# EAGLE board lcmeter (EAGLE 4.16)
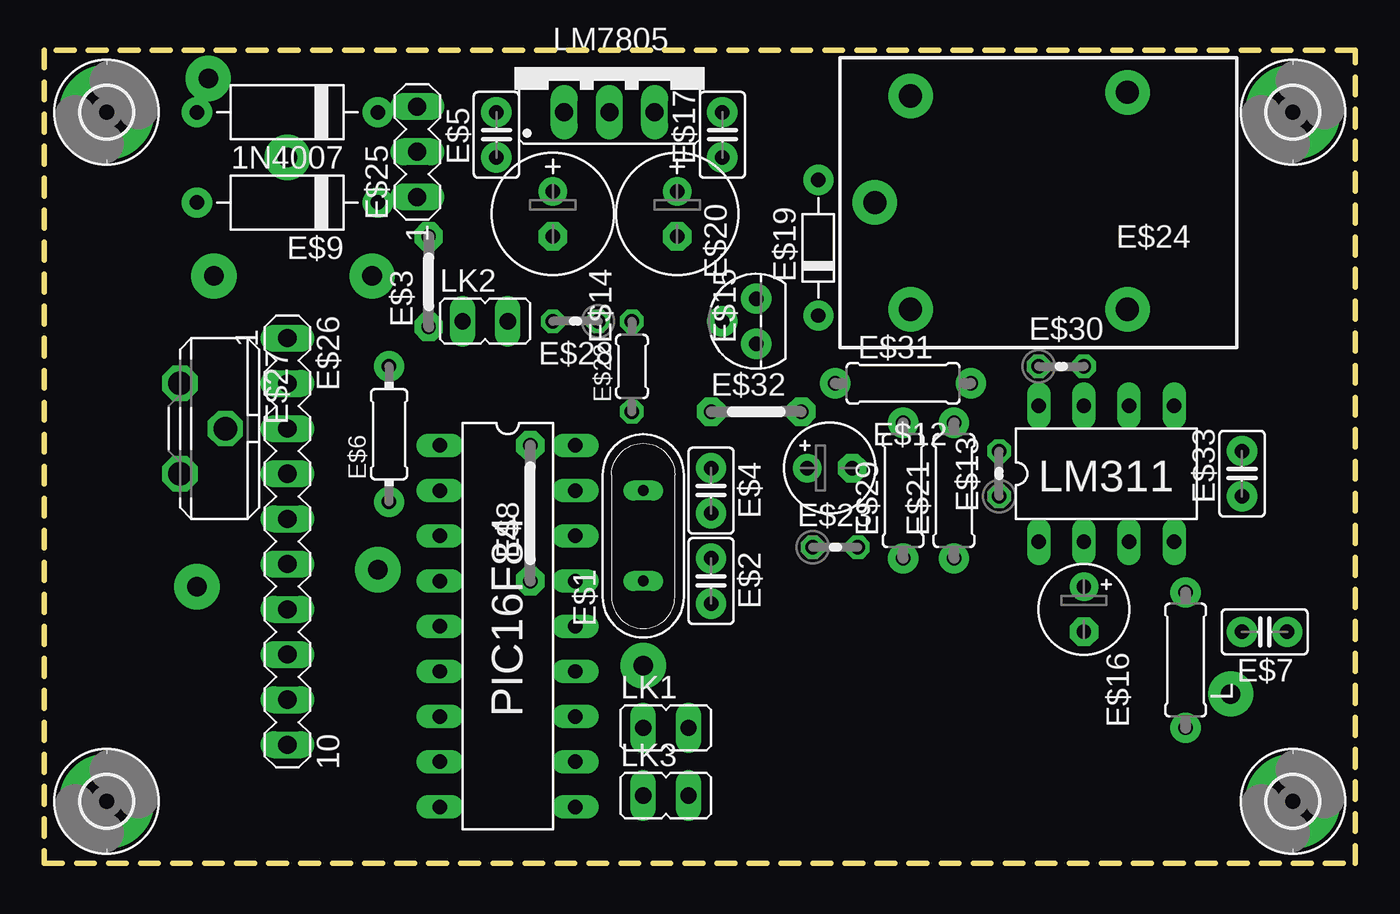
[diagram p0: board, top side]
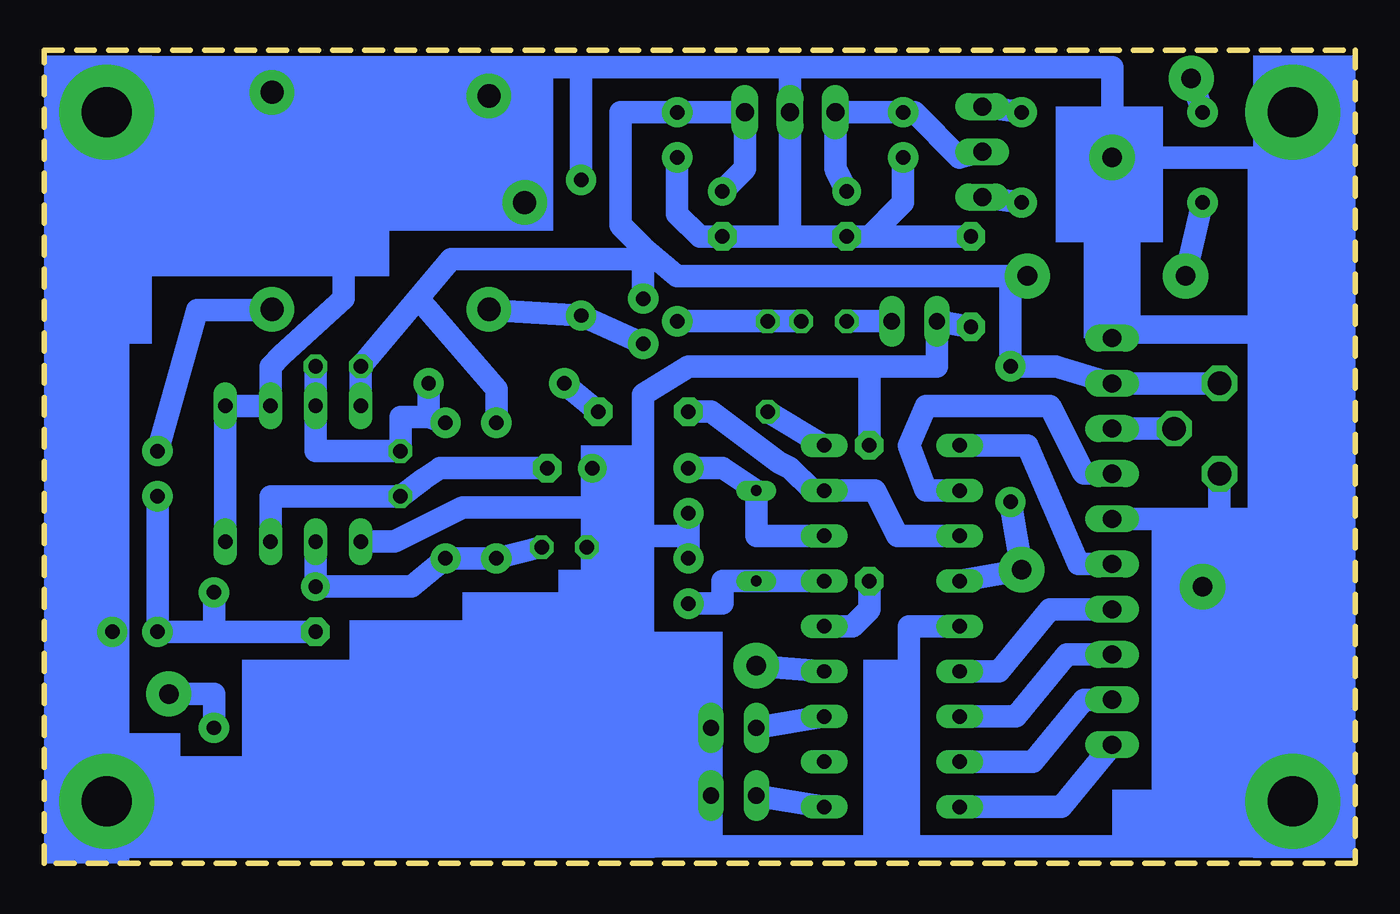
[diagram p1: board, bottom side, seen from below]

Size 73.66 x 45.72 mm. Coordinates in mm from the lower left corner, seen from the top.
Outline: 73.66,45.72 0,45.72 0,0 73.66,0 73.66,45.72
Copper layers (1*16): Top 0.035mm / dielectric 1.5mm / Bottom 0.035mm
Design rules "default": minimum track width 10mil, minimum drill 24mil, track to track 8mil, track to pad 8mil, pad to pad 8mil, via to via 8mil, smd to smd 8mil, copper to edge 40mil, drill to drill 8mil, minimum pad ring 10mil, minimum via ring 8mil, stop-mask expansion 4mil, vias tented up to drill 0mil, thermal gap 10mil

## Footprints (pad centres in the part's own frame; a part is rotated, then mirrored left to right if it is on the bottom)
D-10 = drill 0.813 pad 1.7 round: A 5.08,0; C -5.08,0
QS = drill 0.61 long: 1 -2.54,0; 2 2.54,0
C2.5-2 = drill 0.813 pad 1.7 round: 1 -1.27,0; 2 1.27,0
05 = drill 0.813 pad 1.6 octagon: 1 -2.54,0; 2 2.54,0
0204/7 = drill 0.813 pad 1.7 round: 1 -3.81,0; 2 3.81,0
07 = drill 0.813 pad 1.6 octagon: 1 -3.81,0; 2 3.81,0
E2,5-5 = drill 0.813 pad 1.6 round: + -1.27,0 | drill 0.813 pad 1.6 octagon: - 1.27,0
0204V = drill 0.813 octagon: 1 -1.27,0; 2 1.27,0
E2,5-7 = drill 0.813 pad 1.6 round: + -1.27,0 | drill 0.813 pad 1.6 octagon: - 1.27,0
D-7.5 = drill 0.813 pad 1.7 round: A 3.81,0; C -3.81,0
TO92 = drill 0.813 pad 1.7 round: 1 -1.27,0; 2 0,1.905; 3 1.27,0
0207/7 = drill 0.813 pad 1.7 round: 1 -3.81,0; 2 3.81,0
0204/5 = drill 0.813 octagon: 1 -2.54,0; 2 2.54,0
ZN5 = drill 1.3 pad 2.5 round: 11 8.89,0; 12 -5.31,-6.2; 14 -5.31,6; A1 6.89,6; A2 6.89,-6
MA03-1 = drill 1.016 long: 1 -2.54,0; 2 0,0; 3 2.54,0
MA10-1 = drill 1.016 long: 1 -11.43,0; 2 -8.89,0; 3 -6.35,0; 4 -3.81,0; 5 -1.27,0; 6 1.27,0; 7 3.81,0; 8 6.35,0; 9 8.89,0; 10 11.43,0
ST10 = drill 1.321 octagon: A -2.54,-1.27; E 2.54,-1.27; S 0,1.27
2,8-PAD = drill 2.8 pad 5.334 round: B2,8 0,0
JP1 = drill 0.914 long: 1 0,-1.27; 2 0,1.27
DIL8 = drill 0.813 long: 1 -3.81,-3.81; 2 -1.27,-3.81; 3 1.27,-3.81; 4 3.81,-3.81; 5 3.81,3.81; 6 1.27,3.81; 7 -1.27,3.81; 8 -3.81,3.81
78XXS = drill 1.016 long: GND 0,-2.54; IN -2.54,-2.54; OUT 2.54,-2.54
DIL18 = drill 0.813 long: 1 -10.16,-3.81; 2 -7.62,-3.81; 3 -5.08,-3.81; 4 -2.54,-3.81; 5 0,-3.81; 6 2.54,-3.81; 7 5.08,-3.81; 8 7.62,-3.81; 9 10.16,-3.81; 10 10.16,3.81; 11 7.62,3.81; 12 5.08,3.81; 13 2.54,3.81; 14 0,3.81; 15 -2.54,3.81; 16 -5.08,3.81; 17 -7.62,3.81; 18 -10.16,3.81

## Placement (x,y rotation side)
1N4007  1N4007  [D-10]  13.65,42.23 180 top
E$1  4MHz  [QS]  33.66,18.42 90 top
E$2  33pF  [C2.5-2]  37.47,15.87 270 top
E$3  Vcc  [05]  21.59,32.7 90 top
E$4  33pF  [C2.5-2]  37.47,20.96 270 top
E$5  0.1  [C2.5-2]  25.4,40.96 90 top
E$6  6.8K  [0204/7]  19.37,24.13 90 top
E$7  1nF  [C2.5-2]  68.58,13.02 180 top
E$8  [07]  27.3,19.68 90 top
E$9  1N4007  [D-10]  13.65,37.15 180 top
E$12  10uF  [E2,5-5]  44.13,22.22 0 top
E$13  47K  [0204V]  53.66,21.91 90 top
E$14  22uF  [E2,5-7]  28.58,36.51 270 top
E$15  22uF  [E2,5-7]  35.56,36.51 270 top
E$16  10uF  [E2,5-5]  58.42,14.29 270 top
E$17  0.1  [C2.5-2]  38.1,40.96 90 top
E$19  1N914  [D-7.5]  43.5,34.61 90 top
E$20  PNP  [TO92]  40.01,30.48 90 top
E$21  100K  [0207/7]  51.12,20.96 90 top
E$22  6.8K  [0204/5]  33.02,27.94 90 top
E$23  100K  [0204V]  44.45,17.78 0 top
E$24  Rele  [ZN5]  55.56,37.15 180 top
E$25  [MA03-1]  20.95,40 90 top
E$26  [MA10-1]  13.65,18.1 270 top
E$27  10K  [ST10]  8.89,24.45 270 top
E$28  6.8K  [0204V]  29.84,30.48 180 top
E$29  100K  [0207/7]  48.26,20.96 90 top
E$30  1K  [0204V]  57.15,27.94 0 top
E$31  6.8K  [0207/7]  48.26,26.99 0 top
E$32  [05]  40.01,25.4 0 top
E$33  1nF  [C2.5-2]  67.31,21.91 90 top
E$34  [2,8-PAD]  3.49,3.49 0 top
E$35  [2,8-PAD]  3.49,42.23 0 top
E$36  [2,8-PAD]  70.17,42.23 0 top
E$37  [2,8-PAD]  70.17,3.49 0 top
L  82uH  [0207/7]  64.13,11.43 270 top
LK1  [JP1]  34.93,7.62 270 top
LK2  [JP1]  24.77,30.48 270 top
LK3  [JP1]  34.93,3.81 270 top
LM311  LM311  [DIL8]  59.69,21.91 0 top
LM7805  LM7805  [78XXS]  31.75,44.77 0 top
PIC16F84  PIC16F84  [DIL18]  26.04,13.33 270 top

## Library data of the parts
1N4007 E$2 E$4-E$7 E$9 E$17 E$19-E$21 E$29 E$31 E$33 L = radiocontrol
E$1 = special
E$3 E$8 E$32 LK1-LK3 = jumper
E$12-E$16 E$22 E$23 E$28 E$30 = rcl
E$24 = relay
E$25 E$26 = con-lstb
E$27 = pot
E$34-E$37 = holes
LM311 PIC16F84 = microchip
LM7805 = v-reg

## Nets
GND: E$2.1 E$3.1 E$3.2 E$4.2 E$5.1 E$8.2 E$14.- E$15.- E$17.1 E$19.A E$23.1 E$24.11 E$26.1 E$26.5 LK1.2 LK2.1 LK3.2 LM311.1 LM7805.GND PIC16F84.5
S$1: E$33.2
S$2: E$1.1 E$2.2 PIC16F84.15
S$3: E$9.C E$25.1
S$4: E$1.2 E$4.1 PIC16F84.16
S$5: E$30.1 LM311.8
S$6: 1N4007.C E$25.3
S$7: E$26.6 PIC16F84.1
S$8: E$26.3 E$27.S
S$9: E$5.2 E$14.+ E$25.2 LM7805.IN
S$10: E$26.4 PIC16F84.2
S$11: E$13.1 LM311.3
S$12: 1N4007.A
S$13: LK3.1 PIC16F84.10
S$14: E$28.2 LK2.2
S$15: E$20.2 E$28.1
S$16: PIC16F84.18
S$17: E$19.C E$20.1
S$19: E$6.1 PIC16F84.4
S$20: E$22.1
S$21: E$13.2
S$22: E$30.2 LM311.7
S$23: E$21.1 E$23.2
S$24: E$21.2 E$31.2
S$25: E$29.2
S$26: E$22.2
S$27: E$32.1 PIC16F84.3 PIC16F84.17
S$28: E$31.1 E$32.2
S$29: E$16.- E$33.1 L.1
S$30: E$26.10 PIC16F84.9
S$31: E$26.9
S$32: E$26.8 PIC16F84.7
S$33: E$26.7 PIC16F84.6
S$34: LK1.1 PIC16F84.12
S$36: LM311.5 LM311.6
S$37: E$8.1 PIC16F84.14
VCC: E$9.A E$15.+ E$17.2 E$20.3 E$26.2 E$27.A L.2 LM7805.OUT PIC16F84.13

## Tracks (layer width: path | path; a pad name or v marks a point on that pad's centre or on a via)
GND  (via drill 1.1 pad 2.54)
  Bottom 1.27: E$17.1 38.1,36.51 36.83,35.24 E$15.- 31.75,35.24 | E$5.1 25.4,37.15 27.3,35.24 | 27.3,35.24 E$14.- 31.75,35.24 | 31.75,35.24 LM7805.GND 31.75,44.77 | 31.75,44.77 13.65,44.77 v13.65,39.69 | v13.65,39.69 E$26.1 | v13.65,39.69 5.4,39.69 5.4,19.37 | 31.75,44.77 43.5,44.77 | 43.5,44.77 50.16,44.77 | 43.5,44.77 E$19.A | 27.3,35.24 E$3.2 | E$24.11 48.26,37.78 50.16,39.69 50.16,44.77 | E$3.1 LK2.1 23.49,27.94 27.3,27.94 | 27.3,27.94 37.47,27.94 40.01,26.35 40.01,22.54 | PIC16F84.5 25.08,13.33 25.08,0.95 | 25.08,0.95 36.2,0.95 | 36.2,0.95 40.01,0.95 40.01,18.42 | 37.47,18.42 E$2.1 | 37.47,18.42 E$4.2 | 40.01,18.42 37.47,18.42 | 40.01,18.42 40.01,20 | 40.01,20 40.01,22.54 | 40.01,20 50.16,20 53.98,18.1 LM311.1 | 40.01,22.54 42.86,22.22 | 40.01,18.42 40.01,17.78 E$23.1 | 25.08,0.95 5.4,0.95 5.4,19.37 | E$26.5 7.62,19.37 | 7.62,19.37 5.4,19.37 | 7.62,19.37 7.62,21.91 | 36.2,0.95 LK3.2 LK1.2 | E$8.2 27.3,27.94 | 50.16,44.77 68.9,44.77
S$1
  Bottom 1.27: 60.96,31.11 65.09,31.11 E$33.2
S$2
  Bottom 1.27: PIC16F84.15 E$1.1 35.56,15.87 35.56,14.61 E$2.2
S$3
  Bottom 1.27: E$9.C E$25.1
S$4
  Bottom 1.27: PIC16F84.16 33.66,18.42 E$1.2 35.56,22.22 E$4.1
S$5
  Bottom 1.27: 40.01,33.97 50.8,33.97 E$30.1 | E$30.1 LM311.8 E$30.1
S$6
  Bottom 1.27: 1N4007.C E$25.3
S$7
  Bottom 1.27: E$26.6 15.56,16.83 18.41,23.5 PIC16F84.1
S$8
  Bottom 1.27: E$27.S E$26.3
S$9
  Bottom 1.27: E$25.2 22.23,39.69 24.77,42.23 E$5.2 LM7805.IN 29.21,39.05 E$14.+
S$10
  Bottom 1.27: PIC16F84.2 24.13,20.96 25.08,23.5 24.13,25.72 17.15,25.72 15.24,21.91 E$26.4
S$11
  Bottom 1.27: LM311.3 60.96,20.64 E$13.1 52.39,21.59 51.43,22.22 45.4,22.22
S$12  (via drill 1.1 pad 2.54)
  Bottom 1.27: v9.21,44.13 1N4007.A
S$13
  Bottom 1.27: PIC16F84.10 LK3.1
S$14
  Bottom 1.27: LK2.2 E$28.2
S$15
  Bottom 1.27: E$28.1 E$20.2
S$17
  Bottom 1.27: E$20.1 E$19.C 48.58,31.11
S$18  (via drill 1.1 pad 2.54)
  other vias: 18.73,16.51
S$19
  Bottom 1.27: E$6.1 18.73,16.51 PIC16F84.4
S$20
  Bottom 1.27: 29.84,23.5 E$22.1
S$22
  Bottom 1.27: 53.66,23.18 58.42,23.18 LM311.7 E$30.2
S$23
  Bottom 1.27: E$23.2 48.26,17.15 E$21.1 53.02,15.56 58.42,15.56 58.42,18.1
S$24
  Bottom 1.27: E$21.2 52.07,25.08 | 52.07,25.08 53.66,25.08 53.66,23.18 | E$31.2 52.07,25.08
S$25
  Bottom 1.27: E$29.2 48.26,26.67 52.39,31.43
S$26
  Bottom 1.27: E$22.2 31.12,30.48
S$27
  Bottom 1.27: E$32.1 36.2,25.4 32.38,22.54 31.75,22.22 30.48,20.96 PIC16F84.17 26.99,20.96 25.72,18.42 PIC16F84.3
S$28
  Bottom 1.27: E$32.2 E$31.1
S$29
  Bottom 1.27: E$33.1 67.31,13.02 64.13,13.02 | 64.13,13.02 E$16.- | 64.13,13.02 L.1
S$30
  Bottom 1.27: PIC16F84.9 16.51,3.18 E$26.10
S$31
  Bottom 1.27: 22.54,5.72 18.1,5.72 15.24,9.21 E$26.9
S$32
  Bottom 1.27: PIC16F84.7 19.05,8.25 16.19,11.75 E$26.8
S$33
  Bottom 1.27: PIC16F84.6 20,10.79 17.15,14.29 E$26.7
S$34
  Bottom 1.27: PIC16F84.12 LK1.1
S$36
  Bottom 1.27: 63.5,17.78 LM311.5 LM311.6 60.96,27.94 60.32,28.57 56.83,31.75 56.83,33.65
S$37
  Bottom 1.27: PIC16F84.14 28.26,13.33 27.3,14.29 E$8.1
VCC  (via drill 1.1 pad 2.54)
  Bottom 1.27: E$15.+ 34.29,39.05 LM7805.OUT E$17.2 41.27,42.23 41.27,35.88 40.01,34.61 | 40.01,34.61 E$20.3 | 40.01,34.61 38.1,33.02 19.37,33.02 | 19.37,33.02 19.37,27.94 16.83,27.94 E$26.2 E$27.A | E$9.A v9.53,33.02 | 18.1,33.02 19.37,33.02 | L.2 64.13,9.53 v66.68,9.53 | PIC16F84.13 v33.66,11.11
  other vias: 8.57,15.56 18.41,33.02
(copper drawn outside any net)
  shapes: Bottom area x21